# Altium PCB PCB_assembly_drawing_try2.PcbDoc (part 2 of 5)
Units mm, origin at the board's own origin, x right, y up, seen from the top; angles counter-clockwise.
Board outline 187.5 x 240 mm, 2 copper layers (Top Layer, Bottom Layer), stack 2.8 mm thick; 485 components, 419 nets, 1569 pads, 683 vias.
Unrouted connection lines stored in the file: 11.
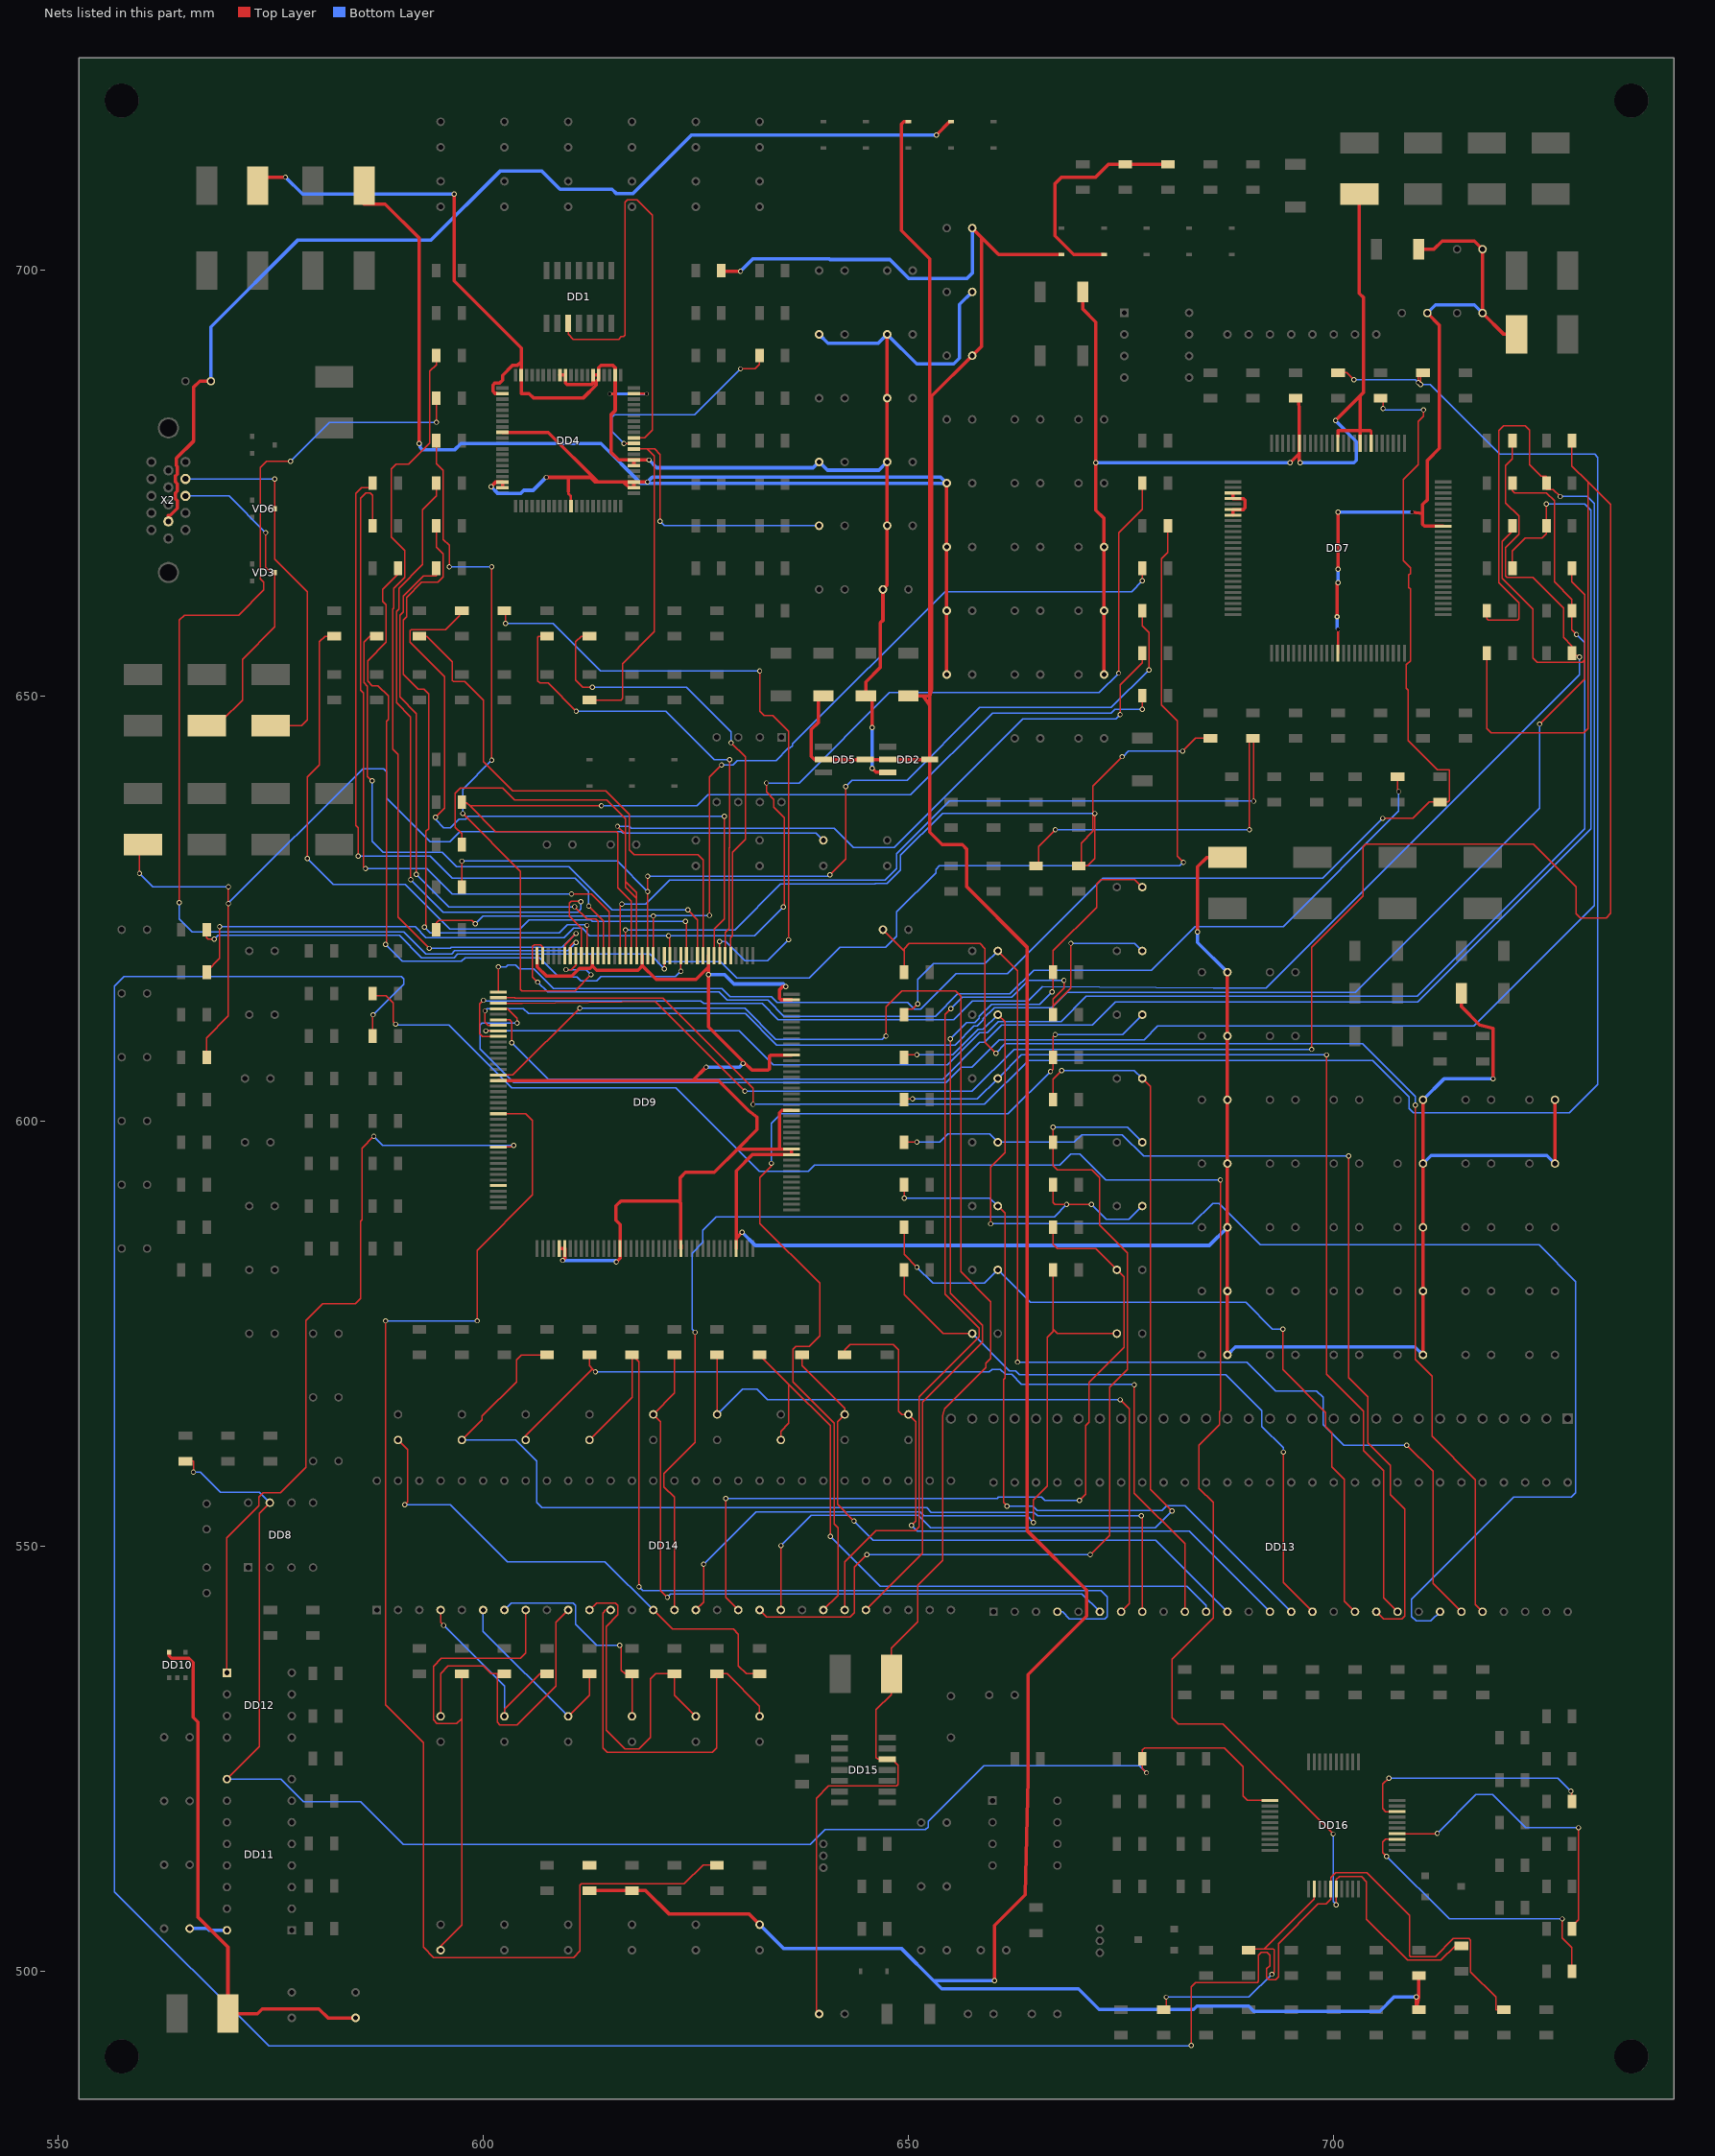
[diagram p2: the nets of this part, all layers, seen from the top]

## Via types
v1: diameter 0.6, hole 0.4, Top Layer to Bottom Layer, 677 vias
v2: diameter 0.5, hole 0.4, Top Layer to Bottom Layer, 3 vias
v3: diameter 0.4, hole 0.4, Top Layer to Bottom Layer, 2 vias
v4: diameter 0.6, hole 0.3, Top Layer to Bottom Layer, 1 vias

## Nets (pads, with @x,y where several pads share a name; then routed paths per layer and width w, separated by ;. In a path a pad name is that pad's centre, name@x,y a point inside that pad or via, vN(x,y) a via of type N, cw(c..) or ccw(c..) an arc to the next point about the centre after c; other vN are vias at no path point) (continued)
3V3SD: C64.1 C65.2 C66.2 C67.2 C68.2 C69.2 C71.2 C73.2 C75.2 C77.2 C81.2 C85.2 C89.2 C94.2 C98.2 DD9.17 DD9.36 DD9.45 DD9.46 DD9.56 DD9.67 DD9.77 DD9.91 DD9.92 DD9.99 DD9.109 DD9.119 DD9.129 DD9.141 DD9.150 DD9.160 L19.2 | length 396.9
  Top Layer w0.4: DD9.17@601.8,604.75 624.637,604.75 ; DD9.160@606.35,619.45 606.35,618.133 607.449,617.035 610.408,617.035 611.33,617.957 612.571,617.957 612.85,618.236 ; DD9.45@608.95,585 DD9.46@609.6,585 609.6,583.87 v1(609.346,583.616) ; DD9.150@612.85,619.45 612.85,618.236 ; v1(615.645,583.438) 616.1,583.893 DD9.56@616.1,585 616.1,587.835 615.62,588.315 615.62,590.017 616.204,590.601 622.945,590.601 ; DD9.67@623.25,585 623.25,585.411 623.199,585.462 623.199,590.347 622.945,590.601 ; v1(626.236,606.349) 624.637,604.75 ; DD9.129@626.5,619.45 626.5,618.127 ; DD9.77@629.75,585 629.75,586.214 ; v1(630.453,586.918) 629.75,586.214 ; v1(630.555,606.755) v1@630.688,606.888 ; v1(635.584,615.798) 635.203,615.798 634.848,615.442 634.848,614.402 635,614.25 DD9.119@636.25,614.25 ; DD9.99@636.25,601.25 635.134,601.25 634.848,600.964 634.848,596.852 635,596.7 ; DD9.109@636.25,607.75 633.76,607.75 633.654,607.644 633.654,606.12 633.501,605.968 631.608,605.968 v1@630.688,606.888 ; v1(683.997,622.224) 683.997,629.895 685.102,631 L19.2@687.5,631 ; C73.2@687.5,572.5 C71.2@687.5,580 C68.2@687.5,587.5 C69.2@687.5,595 C65.2@687.5,602.5 C67.2@687.5,610 C66.2@687.5,617.5 ; C81.2@710.5,572.5 C77.2@710.5,580 C75.2@710.5,587.5 C89.2@710.5,595 C85.2@710.5,602.5 ; C64.1@715,615 715,613.461 717.159,611.302 718.718,610.895 v1(718.718,604.952) ; C98.2@726,595 C94.2@726,602.5 ; 612.85,618.236 613.358,617.728 618.192,617.728 618.726,618.262 ; 618.726,618.262 DD9.141@618.7,619.45 618.7,618.289 618.726,618.262 ; 618.726,618.262 620.331,616.658 625.031,616.658 626.5,618.127 ; 622.945,590.601 623.189,590.601 623.189,593.344 623.799,593.954 627.177,593.954 629.923,596.7 ; 624.637,604.75 627.683,604.75 631.241,601.193 632.206,600.456 632.206,598.983 629.923,596.7 ; 626.5,618.127 v1(626.5,617.211) 626.5,611.076 v1@630.688,606.888 ; 629.75,586.214 629.75,594.143 631.658,596.05 DD9.91@636.25,596.05 DD9.92@636.25,596.7 635,596.7 ; 629.923,596.7 635,596.7
  Bottom Layer w0.4: v1(609.346,583.616) 615.467,583.616 v1(615.645,583.438) ; v1(626.236,606.349) 630.149,606.349 v1(630.555,606.755) ; v1(626.5,617.211) 628.383,617.211 629.479,616.115 635.267,616.115 v1(635.584,615.798) ; v1(630.453,586.918) 632.003,585.368 685.368,585.368 C68.2@687.5,587.5 ; v1(683.997,622.224) 683.997,621.003 C66.2@687.5,617.5 ; C73.2@687.5,572.5 688.456,573.456 709.544,573.456 C81.2@710.5,572.5 ; C89.2@710.5,595 711.46,595.96 725.04,595.96 C98.2@726,595 ; C85.2@710.5,602.5 712.952,604.952 v1(718.718,604.952)
5V_DDC: R50.2 R51.2 VD15.1 | length 27
  Top Layer w0.4: VD15.1@673,701.9 669.421,701.9 667.233,704.088 667.233,710.209 668.02,710.997 672.008,710.997 673.511,712.5 R50.2@675.5,712.5 R51.2@680.5,712.5
5V_STBY: C6.1 C9.1 C35.1 C36.1 C169.1 DD2.2 DD2.4 DD5.2 DD5.4 R1.2 R206.1 R207.1 R209.1 R236.2 VD9.1 VD16.1 | length 482
  Top Layer w0.4: R206.1@612.5,509.5 R207.1@617.5,509.5 619.124,509.5 621.843,506.781 631.219,506.781 C169.1@632.5,505.5 ; R1.2@628,700 628,699.922 v1(630.25,699.922) ; C35.1@640,650 639.394,650 639.394,646.836 638.581,646.024 638.581,642.874 638.955,642.5 DD5.2@640,642.5 DD5.4@644.925,642.5 DD2.2@647.575,642.5 DD2.4@652.5,642.5 ; C6.1@650,650 651.764,650 ; VD9.1@650,717.5 649.453,717.5 649.158,717.205 649.158,704.713 652.501,701.37 652.501,650 ; C36.1@657.5,705 658.571,703.929 ; v1(660.121,498.907) 660.121,505.384 663.735,508.999 664.083,522.648 664.083,534.924 670.966,541.807 670.966,544.83 663.931,551.866 663.931,620.46 656.869,627.521 656.869,631.952 656.336,632.485 653.974,632.485 652.501,633.959 DD2.4@652.5,642.5 ; VD16.1@668,701.9 660.6,701.9 658.571,703.929 ; v1(709.701,496.997) R236.2@709.701,495.5 ; R236.2@710,495.5 R236.2@709.701,495.5 ; R209.1@710,499.5 709.981,499.5 709.981,496.997 709.971,496.947 709.711,495.554 R236.2@709.701,495.5 ; 651.764,650 652.501,648.92 ; 651.764,650 652.501,650 ; DD2.4@652.5,642.5 652.501,648.92 ; 652.501,648.92 652.501,650 ; 652.501,650 652.729,650.748 652.729,685.229 C9.1@657.5,690 658.571,691.071 658.571,703.929
  Bottom Layer w0.4: v1(630.25,699.922) 631.686,701.358 640.728,701.358 640.793,701.294 647.827,701.294 650.075,699.046 656.844,699.046 657.5,699.702 C36.1@657.5,705 ; C169.1@632.5,505.5 635.283,502.717 649.148,502.717 652.958,498.907 ; v1(660.121,498.907) 652.958,498.907 ; v1(709.701,496.997) 707.081,496.997 705.398,495.315 690.602,495.315 690,495.917 683.92,495.917 683.523,495.52 672.397,495.52 669.976,497.942 653.923,497.942 652.958,498.907
5V_VGA: C172.2 VD10.1 X2.9 | length 125.5
  Top Layer w0.4: X2.9@563,670.5 563,671.201 563.192,671.201 564.054,672.063 564.054,672.937 563.8,673.191 563.8,673.809 564.054,674.063 564.054,674.937 563.8,675.191 563.8,675.809 564.054,676.063 564.054,676.955 563.946,677.063 563.946,677.937 565.988,679.979 565.988,686.308 566.68,687 C172.2@568,687 ; v1(653.287,715.95) 654.837,717.5 VD10.1@655,717.5
  Bottom Layer w0.4: C172.2@568,687 568,693.374 578.231,703.605 593.903,703.605 601.98,711.683 606.905,711.683 609.041,709.546 615.174,709.546 615.692,709.028 617.563,709.028 624.484,715.95 v1(653.287,715.95)
5Va: C130.2 DD11.16 | length 4.5
  Bottom Layer w0.4: C130.2@565.5,505.04 567.588,505.04 567.788,504.84 DD11.16@569.88,504.84
5Vb: C128.1 DD10.5 L20.2 | length 62.2
  Top Layer w0.4: DD10.5@563.1,537.54 563.1,537.101 563.372,536.829 565.404,536.829 565.912,536.321 565.912,529.869 566.454,529.327 566.454,506.391 570,502.845 L20.2@570,495.04 573.456,495.04 574.021,495.605 580.695,495.605 581.76,494.54 C128.1@585,494.54
12MHZ: C158.1 DD9.16 DD15.12 L24.1 | length 201.5
  Top Layer w0.15: DD9.16@601.8,605.4 603.495,605.4 v1(611.353,613.258) ; C158.1@639.5,495 639.166,495 639.166,520.333 640.625,521.792 648.614,521.792 648.792,521.97 648.792,524.256 648.088,524.96 DD15.12@647.5,524.96 646.386,524.96 646.201,525.145 646.201,530.763 648,532.562 L24.1@648,535 648,538.023 651.078,541.101 651.078,545.389 654.05,548.361 654.05,565.361 654.251,566.138 659.111,570.998 659.111,571.519 659.663,572.072 659.663,578.764 656.158,582.27 656.158,614.68 655.529,615.309 649.224,615.309 647.344,613.429 v1(647.344,610.006)
  Bottom Layer w0.15: v1(611.353,613.258) 630.756,613.258 634.414,609.6 646.938,609.6 v1(647.344,610.006)
9883_HS: DD4.30 R14.2 | length 25.8
  Top Layer w0.15: v1(616.544,679.675) DD4.30@617.722,679.675 ; v1(630.25,688.442) 631.952,688.442 632.5,688.99 R14.2@632.5,690
  Bottom Layer w0.15: v1(616.544,679.675) 615.143,681.076 615.143,682.752 615.419,683.028 624.836,683.028 v1(630.25,688.442)
9883_VS: DD1.10 DD4.31 | length 56
  Top Layer w0.15: DD1.10@610,693.8 610,692.506 610.584,691.921 615.928,691.921 616.222,692.215 616.498,692.215 616.671,692.388 616.671,708.035 616.966,708.33 618.097,708.33 619.9,706.527 619.9,681.216 619.009,680.325 DD4.31@617.722,680.325
+3V3: C1.1 C2.1 C3.1 C4.1 DD4.11 DD4.22 DD4.23 DD4.69 DD4.78 DD4.79 L1.1 | length 201.4
  Top Layer w0.3: 610.026,674.01 610.026,673.774 610.3,673.5 610.3,672.8 DD4.11@610.4,672.7
  Top Layer w0.4: L1.1@586,710 586,707.822 588.493,707.822 592.48,703.834 v1(592.48,679.653) ; v1(600.939,674.592) 601.472,675.125 DD4.78@602.278,675.125 DD4.79@602.278,674.475 ; DD4.69@602.278,680.975 607.643,680.975 613.486,675.132 616.538,675.132 616.545,675.125 ; v1(607.403,675.687) 610.026,675.687 ; 610.026,674.01 610.026,675.687 ; v1(619.306,675.125) DD4.23@617.722,675.125 ; C1.1@654.5,652.5 C2.1@654.5,660 C3.1@654.5,667.5 C4.1@654.5,675 ; 610.026,675.687 612.649,675.687 613.211,675.125 616.545,675.125 ; 616.545,675.125 DD4.23@617.722,675.125 ; 616.545,675.125 617.195,674.475 DD4.22@617.722,674.475 DD4.23@617.722,675.125
  Bottom Layer w0.4: v1(592.48,679.653) 592.58,679.653 592.58,679.206 592.836,678.95 596.689,678.95 597.392,679.653 613.867,679.653 618.52,675 C4.1@654.5,675 653.809,675.691 619.872,675.691 v1(619.306,675.125) ; v1(600.939,674.592) 601.758,673.773 604.377,673.773 604.765,674.161 605.877,674.161 v1(607.403,675.687)
A3_3V: C57.1 C58.2 C59.2 C60.2 DD7.82 DD7.84 DD7.88 DD7.95 L18.2 R59.1 | length 130.7
  Top Layer w0.3: 704.3,681.2 704.4,681.1 DD7.82@704.4,679.7
  Top Layer w0.4: C57.1@670.5,697.5 670.5,695.477 672.033,693.944 v1(672.033,677.393) 672.033,671.814 673,670.847 C58.2@673,667.5 C59.2@673,660 C60.2@673,652.5 ; v1(694.868,677.393) 695.95,678.475 ; R59.1@695.5,685 695.886,685 695.95,683.201 DD7.95@695.95,679.7 695.95,678.475 ; v1(696.036,677.393) 695.95,677.479 695.95,678.475 ; v1(700.202,682.371) 703.1,685.269 ; DD7.88@700.5,680.5 700.5,681.2 703.1,681.2 ; L18.2@703,709 703,697.327 703.478,696.849 703.478,685.648 703.1,685.269 ; DD7.84@703.1,679.7 703.1,681.2 ; 704.3,681.2 703.1,681.2 ; 703.1,681.2 703.1,685.269
  Bottom Layer w0.4: v1(672.033,677.393) v1(694.868,677.393) ; v1(696.036,677.393) 702.386,677.393 702.666,677.672 702.666,679.907 v1(700.202,682.371)
A3V3: C12.1 C14.1 C26.1 C28.1 C30.1 C31.1 C32.1 C33.1 C34.1 DD2.3 DD4.26 DD4.27 DD4.39 DD4.42 DD4.45 DD4.46 DD4.51 DD4.52 DD4.59 DD4.62 L7.1 | length 212.3
  Top Layer w0.3: v2(614.9,685.5) 615.525,685.5 615.583,685.5 ; DD4.39@617.722,685.525 v2@619.175,685.525
  Top Layer w0.4: L7.1@573.5,710 573.5,710.997 v1(576.758,710.997) ; v1(596.595,708.99) 596.595,698.779 604.475,690.9 604.475,689.311 ; 601.538,685.559 601.382,685.559 601.147,685.794 601.147,686.556 601.382,686.79 601.969,686.79 602.278,687.1 602.278,687.687 603.444,688.853 604.017,688.853 604.475,689.311 ; DD4.52@609.025,687.722 DD4.51@609.675,687.722 609.679,687.718 609.679,686.762 609.854,686.587 612.775,686.587 612.925,686.737 DD4.46@612.925,687.722 DD4.45@613.575,687.722 ; DD4.26@617.722,677.075 DD4.27@617.722,677.725 ; v1(619.506,677.725) DD4.27@617.722,677.725 ; v1(645.744,641.453) 646.197,641 DD2.3@647.575,641 ; v1(645.744,646.252) 645.744,650 C14.1@645,650 645,651.629 646.709,653.339 646.709,658.585 647,658.876 C34.1@647,662.5 647.5,663 C33.1@647.5,670 647.5,673.735 C32.1@647.5,677.5 647.5,681.228 C31.1@647.5,685 C30.1@647.5,692.5 ; 604.475,689.311 DD4.59@604.475,687.722 604.475,685.525 605.409,685.525 605.888,685.046 611.805,685.046 613.294,686.535 613.294,686.984 613.575,687.265 DD4.45@613.575,687.722 ; DD4.45@613.575,687.722 613.575,688.594 613.854,688.873 615.246,688.873 615.525,688.594 DD4.42@615.525,687.722 615.525,685.5 615.525,683.53 615.018,683.023 615.018,678.657 615.95,677.725 DD4.27@617.722,677.725
  Bottom Layer w0.3: v2(614.9,685.5) v2(619.2,685.5)
  Bottom Layer w0.4: v1(576.758,710.997) 578.764,708.99 v1(596.595,708.99) ; v1(619.506,677.725) 620.418,676.813 638.813,676.813 C26.1@639.5,677.5 640.471,676.529 646.529,676.529 C32.1@647.5,677.5 ; C28.1@639.5,692.5 640.561,691.439 646.439,691.439 C30.1@647.5,692.5 650.974,689.026 655.32,689.026 656.006,689.712 656.006,696.006 C12.1@657.5,697.5 ; v1(645.744,641.453) v1(645.744,646.252)
ADC1: DD16.34 R222.2 | length 37.1
  Top Layer w0.15: DD16.34@707.45,516.2 712.136,516.2 v1(712.165,516.23) ; R222.2@728,505 728,505.308 728.777,506.084 v1(728.777,516.89)
  Bottom Layer w0.15: v1(712.165,516.23) 716.724,520.788 718.675,520.788 722.573,516.89 v1(728.777,516.89)
ADC2: DD16.33 R224.2 | length 34
  Top Layer w0.15: v1(706.222,513.537) 705.764,513.994 705.764,515.194 706.12,515.55 DD16.33@707.45,515.55 ; v1(726.872,506.171) 726.872,503.911 728,502.782 R224.2@728,500
  Bottom Layer w0.15: v1(706.222,513.537) 713.588,506.171 v1(726.872,506.171)
ASIC_H: C39.1 L9.2 R108.2 | length 118.9
  Top Layer w0.15: v1(559.613,629.107) 559.613,632.5 L9.2@560,632.5 ; R108.2@567.5,607.5 567.5,609.791 570.052,612.343 v1(570.052,625.551) v1(570.052,627.532)
  Bottom Layer w0.15: v1(559.613,629.107) 561.188,627.532 v1(570.052,627.532) ; v1(570.052,625.551) 570.052,625.642 585.851,641.441 588.289,641.441 588.634,641.096 588.634,637.969 593.779,632.824 596.062,632.824 597.279,634.041 616.243,634.041 616.427,633.857 639.143,633.857 C39.1@640,633
ASIC_RESET: DD8.7 DD11.9 DD16.11 R118.2 R182.1 | length 185.7
  Top Layer w0.15: R118.2@565,560 565.937,560 v1(565.937,558.724) ; DD11.9@569.88,522.62 573.684,526.424 573.684,553.884 DD8.7@574.92,555.12 ; v1(677.977,523.367) 677.5,523.844 R182.1@677.5,525 677.5,526.034 677.754,526.288 687.146,526.288 689.356,524.078 689.356,520.608 689.864,520.1 DD16.11@692.5,520.1
  Bottom Layer w0.15: v1(565.937,558.724) 566.751,558.724 569.121,556.353 573.282,556.353 573.31,556.325 573.715,556.325 DD8.7@574.92,555.12 ; DD11.9@569.88,522.62 576.235,522.62 578.891,519.963 585.572,519.963 590.601,514.934 638.48,514.934 640.217,516.671 652.018,516.671 652.329,516.982 652.329,517.62 658.889,524.18 677.164,524.18 v1(677.977,523.367)
ASIC_SCL: DD16.26 R114.2 R221.2 | length 237.1
  Top Layer w0.15: R114.2@587,615 587,614.731 588.569,614.731 589.432,613.867 589.432,611.657 v1(589.712,611.378) ; v1(686.664,593.065) 686.664,565.912 686.562,565.81 686.562,564.29 684.171,561.899 684.171,556.822 685.851,555.142 685.851,541.553 680.999,536.702 680.999,529.819 681.736,529.082 686.994,529.082 v1(699.922,516.153) ; v1(700.3,507.822) DD16.26@700.3,509.7 700.3,510.794 700.656,511.15 703.25,511.15 703.859,510.54 703.859,506.146 708.684,501.321 712.593,501.321 714.272,503 R221.2@715,503
  Bottom Layer w0.15: v1(589.712,611.378) 589.788,611.302 595.963,611.302 603.377,603.887 622.653,603.887 632.46,594.081 638.226,594.081 638.962,594.817 667.766,594.817 669.061,596.113 670.154,596.113 673.202,593.065 v1(686.664,593.065) ; v1(699.922,516.153) 699.922,508.2 v1(700.3,507.822)
ASIC_SDA: DD16.25 R115.2 R219.2 | length 357.1
  Top Layer w0.15: R115.2@587,610 587,612.425 v1(587.07,612.496) ; v1(683.235,491.312) 683.235,498.17 683.768,498.704 691.007,498.704 691.159,498.856 691.159,501.904 691.499,502.243 692.15,502.243 692.48,501.913 692.48,500.679 692.105,500.304 692.105,499.333 692.404,499.034 693.166,499.034 693.496,499.364 693.496,503.263 698.164,507.931 699.073,507.931 699.65,508.508 DD16.25@699.65,509.7 699.65,511.048 700.209,511.607 703.885,511.607 708.914,506.578 708.914,501.852 709.041,501.725 711.935,501.725 714.07,503.86 715.924,503.86 716.102,503.682 716.102,499.948 719.074,496.976 719.074,495.5 R219.2@720,495.5
  Bottom Layer w0.15: v1(587.07,612.496) 590.652,616.077 590.652,616.712 590.372,616.991 582.675,616.991 582.656,616.972 557.79,616.972 556.666,615.848 556.666,509.372 574.802,491.236 630.775,491.236 630.792,491.219 683.141,491.219 v1(683.235,491.312)
AUDIO_EN: DD16.38 R215.2 | length 29
  Top Layer w0.15: v1(706.476,522.732) 705.764,522.021 705.764,519.156 706.12,518.8 DD16.38@707.45,518.8 ; v1(727.888,521.183) 728,521.07 R215.2@728,520
  Bottom Layer w0.15: v1(706.476,522.732) 726.338,522.732 v1(727.888,521.183)
AUDIO_MUTE: DD16.22 R212.2 R233.1 | length 31.2
  Top Layer w0.15: R212.2@680,495.5 680.288,495.5 v1(680.288,496.976) ; R233.1@690,502.5 R233.1@690.105,502.5 ; v1(692.734,499.669) 692.988,499.923 692.988,502.567 692.907,502.648 691.816,502.648 ; DD16.22@697.7,509.7 697.7,508.531 691.816,502.648 ; R233.1@690.105,502.5 R233.1@690.253,502.648 ; R233.1@690.105,502.5 690.105,502.648 R233.1@690.253,502.648 ; R233.1@690.253,502.648 691.816,502.648
  Bottom Layer w0.15: v1(680.288,496.976) 690.042,496.976 v1(692.734,499.669)
B_IN: L4.1 VD3.3 X2.3 | length 39
  Top Layer w0.15: L4.1@567.5,646.5 567.5,647.09 569.29,647.09 571.703,649.503 571.703,654.304 575.5,658.101 VD3.3@575.5,664.5 575.056,664.5 574.446,665.11 v1(574.446,669.188)
  Bottom Layer w0.15: X2.3@565,673.5 570.135,673.5 v1(574.446,669.188)
B_INA0: DD9.147 R32.2 | length 85
  Top Layer w0.15: v1(586.181,629.666) 585.947,629.901 585.947,650.322 585.597,650.672 585.597,673.227 586.232,673.862 586.721,673.862 587,673.583 R32.2@587,670 ; v1(610.387,626.694) 612.722,626.694 614.8,624.616 DD9.147@614.8,619.45
  Bottom Layer w0.15: v1(586.181,629.666) 593.397,629.666 596.369,626.694 v1(610.387,626.694)
B_INA1: DD9.148 R31.2 | length 82.6
  Top Layer w0.15: v1(585.318,631.165) 585.318,634.492 585.038,634.771 585.038,673.811 585.724,674.497 587,674.497 R31.2@587,675 ; v1(612.419,625.272) 614.15,623.541 DD9.148@614.15,619.45
  Bottom Layer w0.15: v1(585.318,631.165) 593.801,631.165 596.392,628.574 610.832,628.574 612.419,626.986 v1(612.419,625.272)
B_INA2: DD9.149 R30.2 | length 67.2
  Top Layer w0.15: v1(592.15,629.006) 592.15,647.903 590.203,649.85 590.203,659.49 590.592,659.88 590.592,661.738 592.968,664.113 594.5,664.113 R30.2@594.5,665 ; v1(610.743,625.196) 612.2,623.738 613.259,623.738 613.5,623.498 DD9.149@613.5,619.45
  Bottom Layer w0.15: v1(592.15,629.006) 595.96,625.196 v1(610.743,625.196)
B_INA3: DD9.151 R29.2 | length 75.8
  Top Layer w0.15: v1(593.09,622.783) 593.268,622.96 593.268,634.06 593.598,634.39 593.598,650.24 593.065,650.773 592.365,650.773 590.607,652.531 590.607,658.893 590.996,659.282 590.996,661.558 592.785,663.346 594.69,663.346 595.3,663.956 595.3,666.674 594.5,667.474 R29.2@594.5,670 ; DD9.151@612.2,619.45 v1(612.2,623.002)
  Bottom Layer w0.15: v1(593.09,622.783) 593.75,622.122 608.962,622.122 609.919,623.079 612.123,623.079 v1(612.2,623.002)
B_INA4: DD9.152 R28.2 | length 80.1
  Top Layer w0.15: v1(591.49,628.396) 591.49,647.488 589.799,649.178 589.799,659.894 590.099,660.195 590.099,662.644 592.887,665.431 592.887,671.893 594.5,673.506 R28.2@594.5,675 ; v1(611.505,625.805) 611.486,625.825 610.337,625.825 610.114,625.602 610.114,624.111 611.55,622.675 DD9.152@611.55,619.45
  Bottom Layer w0.15: v1(591.49,628.396) 595.325,624.561 611.124,624.561 611.505,624.942 v1(611.505,625.805)
B_INA5: DD9.153 R27.2 | length 89.2
  Top Layer w0.15: R27.2@594.5,680 594.5,677.303 595.3,676.504 595.3,668.401 596.011,667.69 v1(596.011,665.15) ; v1(597.611,636.143) 604.393,629.361 604.393,615.442 604.551,615.284 610.788,615.284 v1(612.699,617.195) ; v1(601.015,642.417) v1(601.015,665.15) ; v1(609.752,617.804) 610.341,617.804 610.9,618.363 DD9.153@610.9,619.45
  Bottom Layer w0.15: v1(596.011,665.15) v1(601.015,665.15) ; v1(597.611,636.143) 597.611,639.013 v1(601.015,642.417) ; v1(609.752,617.804) 612.089,617.804 v1(612.699,617.195)
B_INA6: DD9.154 R26.2 | length 137.7
  Top Layer w0.15: v1(564.269,625.687) 564.28,625.698 564.28,658.877 564.896,659.493 571.274,659.493 574.213,662.432 574.213,663.374 573.811,663.776 573.811,676.834 574.548,677.57 v1(577.342,677.57) ; v1(594.5,682.168) R26.2@594.5,685 ; DD9.154@610.25,619.45 610.25,620.588 610.667,621.005 v1(610.921,621.005)
  Bottom Layer w0.15: v1(564.269,625.687) 564.269,623.754 565.794,622.23 590.671,622.23 593.242,619.658 596.296,619.658 596.662,620.024 609.94,620.024 v1(610.921,621.005) ; v1(577.342,677.57) 581.939,682.168 v1(594.5,682.168)
B_INA7: DD9.155 R25.2 | length 96.9
  Top Layer w0.15: v1(593.649,620.293) 589.985,623.957 589.985,643.122 589.395,643.712 589.395,660.197 589.509,660.31 589.509,662.635 590.779,663.905 590.779,667.08 589.204,668.655 589.204,676.656 589.788,677.24 591.261,677.24 593.725,679.704 593.725,688.162 594.5,688.937 R25.2@594.5,690 ; DD9.155@609.6,619.45 609.6,620.725 v1(610.921,622.046)
  Bottom Layer w0.15: v1(593.649,620.293) 596.123,620.293 596.258,620.428 609.303,620.428 v1(610.921,622.046)
B_INB0: DD9.1 R73.2 R97.2 | length 184.1
  Top Layer w0.15: v1(601.777,618.134) 601.777,615.15 DD9.1@601.8,615.15 ; R73.2@705.5,685 705.79,685 v1(705.79,683.768) ; v1(705.764,635.584) 709.335,635.584 711.251,637.5 R97.2@712.5,637.5 713.421,637.5 713.588,637.667 713.588,641.325 712.182,641.325 708.762,644.745 708.762,650.652 708.539,650.875 708.539,653.65 709.003,654.114 709.003,662.573 708.828,662.749 708.828,664.191 709.003,664.367 709.003,665.076 708.186,665.894 708.186,667.656 708.186,675.458 709.902,677.174 709.902,682.242 710.565,682.904 v1(710.565,683.633)
  Bottom Layer w0.15: v1(601.777,618.134) 602.713,618.134 602.894,618.316 603.831,618.316 604.241,617.906 605.982,617.906 608.293,615.594 628.066,615.594 629.036,614.624 633.869,614.624 634.55,613.943 649.89,613.943 650.697,613.137 651.434,613.137 655.606,617.309 661.623,617.309 672.863,628.548 698.729,628.548 v1(705.764,635.584) ; v1(705.79,683.768) 705.925,683.633 v1(710.565,683.633)
B_INB1: DD9.2 R72.2 R96.2 | length 253.6
  Top Layer w0.15: DD9.2@601.8,614.5 603.719,614.5 603.743,614.476 621.111,614.476 631.723,603.863 v1(631.723,601.955) ; R72.2@700.5,688 701.548,688 v1(702.376,687.172) ; v1(709.955,686.816) 709.955,688 R96.2@710.209,688 ; v1(710.209,686.587) R96.2@710.209,688 ; R96.2@710.5,688 R96.2@710.209,688
  Bottom Layer w0.15: v1(631.723,601.955) 658.927,601.955 664.108,607.136 704.544,607.136 708.837,602.844 708.837,601.472 709.345,600.964 727.71,600.964 731.037,604.291 731.037,678.05 730.679,678.409 719.506,678.409 711.327,686.587 v1(710.209,686.587) ; v1(702.376,687.172) 709.6,687.172 v1(709.955,686.816)
B_INB2: DD9.3 R71.2 R95.2 | length 270.8
  Top Layer w0.15: DD9.3@601.8,613.85 604.63,613.85 620.233,614.029 v1(630.758,603.504) ; v1(697.408,608.432) 697.408,620.42 703.453,626.466 703.453,632.206 703.783,632.536 723.494,632.536 728.472,627.558 728.472,624.389 728.98,623.881 732.028,623.881 732.561,624.414 732.561,672.476 729.911,675.126 ; R95.2@718,655 718,646.176 718.508,645.668 729.403,645.668 729.911,646.176 729.911,675.126 ; R71.2@728,680 728,677.037 729.911,675.126
  Bottom Layer w0.15: v1(630.758,603.504) 657.479,603.504 662.407,608.432 v1(697.408,608.432)
B_INB3: DD9.4 R70.2 R94.2 | length 245.4
  Top Layer w0.15: DD9.4@601.8,613.2 602.876,613.2 604.012,612.064 v1(604.012,611.516) ; R94.2@718,660 718,659.086 718.185,658.901 721.614,658.901 721.792,659.079 721.792,660.908 719.404,663.296 719.404,681.189 719.952,681.736 722.503,681.736 723.011,681.228 723.011,677.196 724.391,675.816 725,675.816 R70.2@725,675 725,674.268 725.78,674.268 v1(726.618,673.43)
  Bottom Layer w0.15: v1(604.012,611.516) 599.883,611.516 599.669,611.302 599.669,608.482 603.614,604.537 654.404,604.537 656.2,606.334 657.479,606.334 660.671,609.526 677.699,609.526 679.323,611.149 716.458,611.149 730.631,625.323 730.631,672.592 729.793,673.43 v1(726.618,673.43)
B_INB4: DD9.6 R69.2 R93.2 | length 198.3
  Top Layer w0.15: DD9.6@601.8,611.9 603.122,611.9 603.377,611.645 v1(603.377,609.219) ; R93.2@721,665 721,667.004 722.524,668.528 724.492,668.528 725,669.036 R69.2@725,670 v1(725,672.567)
  Bottom Layer w0.15: v1(603.377,609.219) 607.655,604.941 654.059,604.941 658.368,609.25 658.953,609.25 660.97,611.267 671.617,611.267 674.345,613.994 709.867,613.994 730.225,634.352 730.225,671.83 729.488,672.567 v1(725,672.567)
B_INB5: DD9.7 R68.2 R92.2 | length 195.5
  Top Layer w0.15: v1(600.227,612.953) 600.227,611.632 600.609,611.25 DD9.7@601.8,611.25 ; R92.2@721,670 721,669.326 719.821,668.147 719.821,663.79 723.392,660.219 723.392,654.431 723.9,653.923 729.228,653.923 729.507,654.202 ; v1(724.205,646.684) 729.507,651.987 729.507,654.202 ; R68.2@728,665 728,663.412 729.507,661.905 729.507,654.202
  Bottom Layer w0.15: v1(600.227,612.953) 600.481,613.207 604.735,613.207 605.314,612.629 630.814,612.629 634.52,608.922 655.465,608.922 657.702,611.159 658.065,611.159 658.765,611.859 658.765,612.004 660.09,613.329 666.826,613.329 668.634,615.137 702.526,615.137 724.205,636.816 v1(724.205,646.684)
B_INB6: DD9.8 R67.2 R91.2 | length 190.2
  Top Layer w0.15: v1(600.304,610.591) 600.313,610.6 DD9.8@601.8,610.6 ; R91.2@721,675 721,674.116 721.254,673.862 725.018,673.862 725.932,672.948 725.932,663.408 728,661.34 R67.2@728,660 728,657.748 v1(728.523,657.225)
  Bottom Layer w0.15: v1(600.304,610.591) 630.117,610.591 634.105,606.603 654.603,606.603 658.365,610.365 659.251,610.365 660.558,611.671 667.932,611.671 670.916,614.655 709.828,614.655 729.513,634.34 729.513,656.234 v1(728.523,657.225)
B_INB7: DD9.9 R66.2 R90.2 | length 188
  Top Layer w0.15: v1(600.023,614.196) 599.598,613.772 599.598,610.3 599.948,609.95 DD9.9@601.8,609.95 ; R90.2@721,680 721,677.85 720.217,677.067 720.217,672.694 721.792,671.119 721.792,669.011 720.225,667.444 720.225,664.083 720.383,663.925 723.392,663.925 726.999,660.318 726.999,656.844 728,655.843 R66.2@728,655 728,654.71 728.726,654.71 v1(728.878,654.558)
  Bottom Layer w0.15: v1(600.023,614.196) 600.098,614.121 625.602,614.121 625.907,613.816 632.79,613.816 634.695,611.911 655.32,611.911 657.546,614.137 664.083,614.137 665.769,615.823 685.823,615.613 692.033,615.613 728.878,652.458 v1(728.878,654.558)
BA0: C117.2 DD14.16 R136.1 | length 86
  Top Layer w0.15: DD14.16@625,542.5 625.907,543.407 v1(625.907,547.878) ; v1(664.693,552.806) 664.693,555.447 666.333,557.088 666.333,574.588 667,575.255 667,575.512 ; R136.1@667,582.5 667,575.512 ; C117.2@674.5,575 667.512,575 667,575.512
  Bottom Layer w0.15: v1(625.907,547.878) 632.053,554.024 651.393,554.024 651.85,553.568 663.931,553.568 v1(664.693,552.806)
BA1: C114.2 DD14.18 R135.1 | length 95.9
  Top Layer w0.15: v1(628.523,555.625) 628.523,543.977 DD14.18@630,542.5 ; R135.1@667,587.5 667,585.499 667.512,584.987 672.013,584.987 C114.2@674.5,582.5 675.335,581.665 675.335,573.38 671.246,569.29 671.246,564.591 670.839,564.185 670.839,556.108 v1(670.103,555.371)
  Bottom Layer w0.15: v1(628.523,555.625) 660.432,555.625 660.561,555.754 665.662,555.754 666.045,555.371 v1(670.103,555.371)
BA2: C111.2 DD14.15 R134.1 | length 105.5
  Top Layer w0.15: DD14.15@622.5,542.5 622.5,555.759 621.267,556.992 621.267,558.537 624.916,562.186 v1(624.916,575.158) ; R134.1@667,592.5 667,590.398 667.203,590.194 v1(668.604,590.194) v1(671.5,590.194)
  Bottom Layer w0.15: v1(624.916,575.158) 624.561,575.513 624.561,584.433 625.841,585.714 625.841,587.172 627.416,588.747 667.156,588.747 v1(668.604,590.194) ; v1(671.5,590.194) 673.278,588.416 675.916,588.416 C111.2@677.5,590
BA3: C108.2 DD14.19 R133.1 | length 114.7
  Top Layer w0.15: DD14.19@632.5,542.5 633.345,541.655 643.128,541.655 643.636,542.163 643.636,547.522 v1(645.109,548.996) ; v1(667,599.262) R133.1@667,597.5 667,594.77 667.512,594.258 671.576,594.258 672.49,593.344 672.49,587.756 675.742,584.505 675.742,570.763 673.667,568.689 673.667,551.29 v1(671.373,548.996)
  Bottom Layer w0.15: v1(645.109,548.996) v1(671.373,548.996) ; v1(667,599.262) 675.738,599.262 C108.2@677.5,597.5
BA4: C105.2 DD14.20 R132.1 | length 122.5
  Top Layer w0.15: DD14.20@635,542.5 v1(635,550.062) ; R132.1@667,602.5 667,604.922 v1(668.02,605.942) ; C105.2@677.5,605 678.434,604.066 678.434,556.666 v1(680.974,554.126)
  Bottom Layer w0.15: v1(635,550.062) 638.558,553.62 651.146,553.62 652.589,552.177 679.024,552.177 v1(680.974,554.126) ; v1(668.02,605.942) 676.558,605.942 C105.2@677.5,605
BA5: C102.2 DD14.22 R131.1 | length 116.9
  Top Layer w0.15: v1(633.882,595.02) 633.882,594.698 632.536,593.352 632.536,587.959 639.572,580.923 639.572,574.751 638.327,573.507 636.778,573.507 636.422,573.151 636.422,569.316 641.248,564.49 641.248,552.636 641.725,552.16 641.725,544.225 DD14.22@640,542.5 ; v1(666.695,605.815) 667,606.12 R131.1@667,607.5 667,609.901 v1(667.254,610.155)
  Bottom Layer w0.15: v1(633.882,595.02) 633.882,599.719 635,600.837 661.717,600.837 v1(666.695,605.815) ; v1(667.254,610.155) 675.155,610.155 C102.2@677.5,612.5
BA6: C99.2 DD14.23 R128.1 | length 118.2
  Top Layer w0.15: DD14.23@642.5,542.5 642.5,548.139 646.182,551.821 650.782,551.821 651.258,552.298 651.258,567.565 658.329,574.636 658.329,575.614 654.285,579.658 654.285,612.515 v1(654.969,613.199) ; R128.1@667,612.5 667,613.537 ; v1(668.278,616.551) 668.278,615.628 667,614.35 667,613.537 ; v1(669.112,620.903) 669.112,615.649 667,613.537
  Bottom Layer w0.15: v1(654.969,613.199) 656.311,614.541 662.141,614.541 664.15,616.551 v1(668.278,616.551) ; v1(669.112,620.903) 676.597,620.903 C99.2@677.5,620
BA7: C95.2 DD14.24 R127.1 | length 109.6
  Top Layer w0.15: DD14.24@645,542.5 651.662,549.162 651.662,566.948 658.733,574.018 658.733,575.961 654.914,579.78 v1(654.914,609.651) ; v1(666.877,615.172) 667,615.295 R127.1@667,617.5 667,620.014 672.109,625.123 672.109,627.888 672.617,628.396 676.604,628.396 C95.2@677.5,627.5
  Bottom Layer w0.15: v1(654.914,609.651) 656.826,611.563 657.796,611.563 658.31,612.077 658.31,612.28 659.763,613.733 665.438,613.733 v1(666.877,615.172)
BB0: C91.2 DD13.16 R126.1 | length 76.7
  Top Layer w0.15: R126.1@649.5,582.5 649.5,579.581 654.081,575 C91.2@657.5,575 ; v1(694.08,561.061) 694.08,545.72 DD13.16@697.5,542.3
  Bottom Layer w0.15: C91.2@657.5,575 661.893,570.607 662.6,570.607 663.028,570.179 687.324,570.179 691.566,565.937 691.566,564.083 694.08,561.569 v1(694.08,561.061)
BB1: C86.2 DD13.18 R125.1 | length 89.4
  Top Layer w0.15: R125.1@649.5,587.5 649.5,584.305 v1(651.002,582.803) ; v1(694.004,575.513) 694.004,570.789 699.059,565.734 699.059,564.083 699.795,563.347 699.795,559.308 701.243,557.86 701.243,543.557 DD13.18@702.5,542.3
  Bottom Layer w0.15: v1(651.002,582.803) 652.882,580.923 658.923,580.923 C86.2@660.5,582.5 664.337,578.663 689.65,578.663 692.8,575.513 v1(694.004,575.513)
BB2: C82.2 DD13.15 R124.1 | length 87.8
  Top Layer w0.15: R124.1@649.5,592.5 649.5,590.934 v1(649.503,590.931) ; C82.2@660.5,590 661.34,589.16 661.34,569.762 661.167,569.589 661.167,555.148 v1(661.594,554.721)
  Bottom Layer w0.15: v1(649.503,590.931) 659.569,590.931 C82.2@660.5,590 ; v1(661.594,554.721) 664.618,554.721 665.126,554.213 679.789,554.213 680.345,554.769 682.531,554.769 DD13.15@695,542.3
BB3: C78.2 DD13.19 R123.1 | length 115.1
  Top Layer w0.15: R123.1@649.5,597.5 649.5,597.51 v1(651.002,597.51) ; v1(701.767,595.884) 701.767,569.824 704.012,567.579 704.012,562.127 706.653,559.486 706.653,556.057 708.33,554.38 708.33,541.782 708,541.452 705.848,541.452 DD13.19@705,542.3
  Bottom Layer w0.15: v1(651.002,597.51) 653.669,597.51 654.634,598.475 659.525,598.475 C78.2@660.5,597.5 668.195,597.5 ; 668.195,597.5 669.484,597.5 670.382,598.399 675.132,598.399 677.647,595.884 v1(701.767,595.884)
BB4: C76.2 DD13.20 R122.1 | length 120.8
  Top Layer w0.15: R122.1@649.5,602.5 649.5,602.59 v1(650.494,602.59) ; v1(699.16,607.771) 699.16,570.23 703.485,565.905 703.485,561.232 705.841,558.876 705.841,543.959 DD13.20@707.5,542.3
  Bottom Layer w0.15: v1(650.494,602.59) 658.09,602.59 C76.2@660.5,605 663.271,607.771 v1(699.16,607.771)
BB5: C74.2 DD13.22 R121.1 | length 167.8
  Top Layer w0.15: R121.1@649.5,607.5 649.5,607.797 v1(651.002,607.797) ; v1(659.663,587.908) 659.663,594.589 661.34,596.265 661.34,611.66 C74.2@660.5,612.5
  Bottom Layer w0.15: v1(651.002,607.797) 655.224,607.797 658.197,610.769 658.769,610.769 C74.2@660.5,612.5 ; v1(659.663,587.908) 683.387,587.908 685.775,590.296 686.537,590.296 691.388,585.445 724.129,585.445 728.447,581.127 728.447,556.26 727.939,555.752 721.182,555.752 709.168,543.738 709.168,541.731 709.676,541.223 711.423,541.223 DD13.22@712.5,542.3
BB6: C72.2 DD13.23 R120.1 | length 139.4
  Top Layer w0.15: R120.1@649.5,612.5 649.5,613.171 650.484,613.171 v1(651.078,613.766) ; C72.2@660.5,620 662.838,617.662 v1(662.838,571.652) ; v1(708.584,561.873) 711.657,558.8 711.657,545.643 DD13.23@715,542.3
  Bottom Layer w0.15: v1(651.078,613.766) 651.078,616.66 652.934,618.515 659.015,618.515 C72.2@660.5,620 ; v1(662.838,571.652) 689.813,571.652 693.191,568.274 697.992,568.274 698.754,567.512 698.754,564.286 701.167,561.873 v1(708.584,561.873)
BB7: C70.2 DD13.24 R119.1 | length 145.3
  Top Layer w0.15: C70.2@647,622.5 649.5,620 ; R119.1@649.5,617.5 649.5,620 ; v1(660.273,607.974) 659.003,609.244 659.003,620.268 658.419,620.852 650.084,620.852 649.5,620.268 649.5,620 ; v1(709.6,601.878) 709.6,571.957 711.556,570.001 711.556,562.94 716.661,557.835 716.661,543.139 DD13.24@717.5,542.3
  Bottom Layer w0.15: v1(660.273,607.974) 661.365,609.067 703.399,609.067 709.6,602.866 v1(709.6,601.878)
BL_ON_OFF: R206.2
COAST: C25.2 DD4.29 R18.2 | length 65.3
  Top Layer w0.15: R18.2@612.5,649.5 616.204,649.5 616.407,649.703 616.407,653.796 620.141,657.53 620.141,678.18 619.296,679.025 ; DD4.29@617.722,679.025 619.296,679.025 ; v1(620.801,670.508) 620.801,678.383 620.16,679.025 619.296,679.025
  Bottom Layer w0.15: v1(620.801,670.508) 621.309,670 C25.2@639.5,670
D3_3V: C42.1 C45.2 C47.2 C50.2 DD7.38 DD7.67 L13.2 | length 83.5
  Top Layer w0.3: DD7.38@700.5,655 v3@700.5,657.7
  Top Layer w0.4: v4(700.399,659.299) 700.399,663.199 v1(700.5,663.3) ; v1(700.499,664.899) v1(700.5,671.6) v1(700.5,671.6) ; v3(709.2,671.6) 710.445,671.4 ; C42.1@710,702.5 711.771,702.5 712.749,703.478 716.522,703.478 C50.2@717.5,702.5 C47.2@717.5,695 720,692.5 L13.2@721.5,692.5 ; C45.2@711,695 712.431,693.569 712.431,679.084 711.025,677.677 711.025,673.067 710.445,672.487 710.445,671.4 ; DD7.67@712.85,669.95 710.657,669.95 710.445,670.162 710.445,671.4
  Bottom Layer w0.4: v4(700.399,659.299) 700.399,657.901 v3(700.5,657.8) ; v1(700.499,664.899) v1(700.5,663.3) v1(700.5,663.3) v1@700.5,663.207 ; v1(700.5,671.6) v3(709.2,671.6) ; C45.2@711,695 711.96,695.96 716.54,695.96 C47.2@717.5,695
D3_V3: DD7.3 DD7.4 DD7.6 DD7.7 | length 5.2
  Top Layer w0.4: DD7.7@688.15,671.25 DD7.6@688.15,671.9 689.375,671.9 689.559,672.084 689.559,672.997 689.356,673.2 DD7.4@688.15,673.2 DD7.3@688.15,673.85
DE_IN: DD9.159 R98.2 | length 123.8
  Top Layer w0.15: v1(606.425,616.331) 605.815,616.941 605.815,620.522 606.019,620.725 606.771,620.725 607,620.497 DD9.159@607,619.45 ; R98.2@707.5,640.5 707.5,638.878 v1(707.644,638.734)
  Bottom Layer w0.15: v1(606.425,616.331) 607.574,615.182 627.71,615.182 628.672,614.22 633.476,614.22 635.368,612.329 653.172,612.329 655.788,614.945 661.935,614.945 664.718,617.728 678.542,617.728 683.672,622.859 694.08,622.859 707.644,636.422 v1(707.644,638.734)
FBLK: DD9.23 R189.2 | length 161
  Top Layer w0.15: v1(588.518,576.504) 588.518,531.368 592.963,526.923 592.963,502.844 594.157,501.65 610.641,501.65 611.403,502.412 611.403,510.159 611.53,510.286 623.642,510.286 625.856,512.5 R189.2@627.5,512.5 ; v1(599.313,576.504) 599.313,584.802 605.815,591.304 605.815,600.063 605.028,600.85 DD9.23@601.8,600.85
  Bottom Layer w0.15: v1(588.518,576.504) v1(599.313,576.504)
FCLK1: DD9.29 DD12.1 | length 92.4
  Top Layer w0.15: DD12.1@569.88,535.12 569.88,551.008 573.634,554.761 573.634,555.752 574.142,556.26 576.174,556.26 579.171,559.257 579.171,576.555 581.152,578.536 584.987,578.536 585.572,579.12 585.572,588.213 585.749,588.391 585.749,596.798 v1(587.146,598.195) ; DD9.29@601.8,596.95 603.404,596.95 v1(603.58,597.126)
  Bottom Layer w0.15: v1(587.146,598.195) 588.184,597.158 603.549,597.158 v1(603.58,597.126)
G_IN: L5.1 VD6.3 X2.2 | length 45
  Top Layer w0.15: L5.1@575,646.5 578.657,646.5 579.349,647.192 579.349,662.216 575.5,666.064 VD6.3@575.5,672 v1(575.5,675.5)
  Bottom Layer w0.15: X2.2@565,675.5 v1(575.5,675.5)
G_INA0: DD9.125 R40.2 | length 54.9
  Top Layer w0.15: R40.2@612.5,657 611.538,657 610.874,656.336 610.874,651.837 611.728,650.983 612.832,650.983 v1(612.851,651.002) ; DD9.125@629.1,619.45 629.1,621.564 629.303,621.767 629.303,631.589 630.834,633.12 630.834,642.803 v1(629.152,644.486)
  Bottom Layer w0.15: v1(612.851,651.002) 623.888,651.002 629.152,645.738 v1(629.152,644.486)
G_INA1: DD9.126 R39.2 | length 55.9
  Top Layer w0.15: R39.2@607.5,657 606.552,657 606.4,656.848 606.4,651.764 606.679,651.485 607.644,651.485 v1(610.946,648.183) ; DD9.126@628.45,619.45 628.45,622.173 628.899,622.622 628.899,632.097 628.98,632.178 v1(628.98,642.487)
  Bottom Layer w0.15: v1(610.946,648.183) 621.451,648.183 627.146,642.487 v1(628.98,642.487)
G_INA2: DD9.127 R38.2 | length 79.2
  Top Layer w0.15: R38.2@602.5,660 602.64,660 v1(602.64,658.495) ; DD9.127@627.8,619.45 v1(627.8,621.106) ; v1(632.511,652.907) 632.511,648.208 633.019,647.7 634.035,647.7 635.914,645.82 v1(635.914,621.309)
  Bottom Layer w0.15: v1(602.64,658.495) 608.195,658.495 613.783,652.907 v1(632.511,652.907) ; v1(627.8,621.106) 628.523,621.106 630.784,618.846 633.451,618.846 v1(635.914,621.309)
G_INA3: DD9.128 R37.2 | length 83.5
  Top Layer w0.15: v1(594.411,635.709) 595.48,636.778 595.48,652.27 591.425,656.325 591.425,657.643 591.566,657.784 595.605,657.784 597.205,659.384 597.205,660 R37.2@597.5,660 ; DD9.128@627.15,619.45 627.15,622.578 628.345,623.773 v1(628.345,635.813)
  Bottom Layer w0.15: v1(594.411,635.709) 594.411,635.463 595.376,634.498 596.138,634.498 597.154,635.514 597.941,635.514 598.24,635.813 v1(628.345,635.813)
G_INA4: DD9.130 R36.2 | length 63.5
  Top Layer w0.15: R36.2@592.5,657 593.391,657 596.392,653.999 596.392,651.815 596.519,651.688 597.865,651.688 600.05,649.503 600.05,642.264 603.504,638.81 614.426,638.81 617.169,636.067 617.169,631.876 617.728,631.317 625.246,631.317 625.85,630.713 DD9.130@625.85,619.45
G_INA5: DD9.131 R35.2 | length 71.9
  Top Layer w0.15: v1(586.943,640.004) 586.41,640.537 586.41,651.136 586.003,651.542 586.003,656.314 586.689,657 R35.2@587.5,657 ; v1(624.053,624.815) 625.2,623.667 DD9.131@625.2,619.45
  Bottom Layer w0.15: v1(586.943,640.004) 586.943,632.892 588.223,631.612 595.183,631.612 596.875,629.92 610.057,629.92 615.163,624.815 v1(624.053,624.815)
G_INA6: DD9.133 R34.2 | length 80.6
  Top Layer w0.15: v1(579.321,630.862) 579.321,640.429 580.771,641.879 580.771,656.365 581.406,657 R34.2@582.5,657 ; v1(623.773,623.468) 623.9,623.342 DD9.133@623.9,619.45
  Bottom Layer w0.15: v1(579.321,630.862) 582.371,627.812 590.829,627.812 596.087,622.554 604.317,622.554 605.403,623.64 612.663,623.64 612.834,623.468 v1(623.773,623.468)
G_INA7: DD9.134 R33.2 | length 86.8
  Top Layer w0.15: v1(588.518,620.776) 588.615,620.873 588.615,646.996 588.865,647.246 588.865,649.969 587.65,651.184 586.954,651.184 586.425,651.713 586.425,654.12 588.587,656.282 588.587,660.713 588.194,661.106 588.194,662.508 590,664.314 R33.2@590,665 ; v1(623.25,617.611) DD9.134@623.25,619.45
  Bottom Layer w0.15: v1(588.518,620.776) 590.482,618.812 597.47,618.812 597.874,619.216 606.658,619.216 608.922,616.952 611.027,616.952 611.515,616.464 613.338,616.464 613.866,616.991 622.63,616.991 v1(623.25,617.611)
G_INB0: DD9.136 R81.2 R89.2 | length 163.1
  Top Layer w0.15: R81.2@567.5,617.5 567.5,617.576 569.036,619.112 v1(569.036,622.859) ; v1(621.792,621.792) 621.95,621.634 DD9.136@621.95,619.45 ; v1(633.298,639.75) 633.298,638.708 634.187,637.819 634.187,636.88 635.381,635.686 635.381,625.272 v1(635.279,625.17) ; v1(674.706,652.659) 674.706,669.163 677.5,671.957 R89.2@677.5,675
  Bottom Layer w0.15: v1(569.036,622.859) 592.011,622.859 593.296,621.574 609.515,621.574 610.616,622.675 611.632,622.675 612.515,621.792 v1(621.792,621.792) 631.901,621.792 v1(635.279,625.17) ; v1(633.298,639.75) 637.159,639.75 647.776,650.367 672.414,650.367 v1(674.706,652.659)
G_INB1: DD9.137 R80.2 R88.2 | length 169.6
  Top Layer w0.15: R80.2@567.5,622.5 567.5,621.538 567.652,621.386 v1(568.401,621.386) ; v1(621.3,617.906) DD9.137@621.3,619.45 ; R88.2@680.5,670 680.5,666.877 679.725,666.102 679.725,648.919 681.584,647.061 681.584,631.165 v1(682.32,630.428)
  Bottom Layer w0.15: v1(568.401,621.386) 568.841,621.826 590.161,621.826 592.771,619.216 596.59,619.216 596.994,619.62 619.586,619.62 v1(621.3,617.906) 621.3,618.744 627.908,618.744 629.813,616.839 638.327,616.839 641.928,620.44 647.313,620.44 648.612,621.739 648.612,624.584 653.218,629.189 653.218,629.564 653.65,629.996 681.888,629.996 v1(682.32,630.428)
G_INB2: DD9.139 R79.2 R87.2 | length 116.6
  Top Layer w0.15: R79.2@594.5,622.5 594.5,623.316 594.779,623.595 598.678,623.595 v1(599.079,623.194) ; DD9.139@620,619.45 v1(620,624.12) ; v1(626.618,624.18) 626.618,640.436 v1(628.04,641.858) ; v1(677.5,663.524) R87.2@677.5,665
  Bottom Layer w0.15: v1(599.079,623.194) 600.005,624.12 v1(620,624.12) 620.059,624.18 v1(626.618,624.18) ; v1(628.04,641.858) 629.361,641.858 629.869,642.366 634.426,642.366 635.874,643.814 636.056,643.814 636.386,644.144 636.386,644.326 654.314,662.254 676.23,662.254 v1(677.5,663.524)
G_INB3: DD9.140 R78.2 R86.2 | length 117
  Top Layer w0.15: R78.2@597.5,627.5 v1(597.5,630.555) ; DD9.140@619.35,619.45 v1(619.35,626.977) v1(619.35,628.777) ; v1(640.766,628.929) 642.62,630.784 v1(642.62,639.343) ; R86.2@677.5,660 677.5,658.21 678.282,657.428 v1(678.282,653.051)
  Bottom Layer w0.15: v1(597.5,630.555) 615.772,630.555 v1(619.35,626.977) ; v1(619.35,628.777) 619.36,628.767 640.603,628.767 v1(640.766,628.929) ; v1(642.62,639.343) 643.359,640.082 649.836,640.082 658.368,648.614 673.845,648.614 v1(678.282,653.051)
G_INB4: DD9.142 R77.2 R85.2 | length 123.5
  Top Layer w0.15: R77.2@597.5,632.5 597.5,633.781 596.722,634.559 596.722,638.556 597.332,639.166 602.31,639.166 603.707,637.769 614.539,637.769 616.737,635.57 616.737,633.73 ; v1(615.798,634.67) 616.737,633.73 ; DD9.142@618.05,619.45 618.05,626.184 ; v1(674.878,647.776) 674.878,651.281 677.5,653.903 R85.2@677.5,655 ; 616.737,628.159 618.05,626.847 618.05,626.184 ; 616.737,628.159 616.737,627.497 618.05,626.184 ; 616.737,628.159 616.737,633.73
  Bottom Layer w0.15: v1(615.798,634.67) 617.195,634.67 617.423,634.441 641.248,634.441 643.534,632.155 648.335,632.155 663.448,647.268 674.37,647.268 v1(674.878,647.776)
G_INB5: DD9.143 R76.2 R84.2 | length 120.3
  Top Layer w0.15: R76.2@597.5,637.5 597.5,637.432 598.072,637.432 598.447,637.057 ; v1(613.893,637.057) 598.447,637.057 ; DD9.143@617.4,619.45 617.4,625.845 615.848,627.397 615.848,633.857 615.654,634.051 601.453,634.051 598.447,637.057 ; v1(677.5,648.405) R84.2@677.5,650
  Bottom Layer w0.15: v1(613.893,637.057) 625.142,637.057 626.437,638.353 650.265,638.353 659.867,647.954 673.798,647.954 674.249,648.405 v1(677.5,648.405)
G_INB6: DD9.144 R75.2 R83.2 | length 98.6
  Top Layer w0.15: DD9.144@616.75,619.45 v1(616.75,622.478) ; R75.2@670,630 R75.2@670.306,630 ; v1(671.906,636.143) 671.906,630.838 671.068,630 R75.2@670.306,630 ; v1(675.132,642.849) 671.678,639.394 671.678,634.06 670.306,632.689 R75.2@670.306,630 ; v1(682.226,643.484) 683.743,645 R83.2@685.5,645
  Bottom Layer w0.15: v1(616.75,622.478) 629.573,622.478 634.958,627.863 646.072,627.863 646.139,627.93 647.488,627.93 649.086,629.528 649.086,631.25 654.029,636.194 671.855,636.194 v1(671.906,636.143) ; v1(675.132,642.849) 675.234,642.849 675.869,643.484 v1(682.226,643.484)
G_INB7: DD9.145 R74.2 R82.2 | length 133.3
  Top Layer w0.15: DD9.145@616.1,619.45 616.1,625.295 v1(616.315,625.51) ; R74.2@665,630 665.302,630 665.302,632.282 v1(667.258,634.238) ; v1(690.093,634.238) 690.093,645 R82.2@690.5,645 690.601,645 v1(690.601,637.608)
  Bottom Layer w0.15: v1(616.315,625.51) 619.109,625.51 621.9,628.3 645.635,628.3 645.668,628.334 647.257,628.334 648.612,629.689 648.612,631.432 654.787,637.608 v1(690.601,637.608) ; v1(667.258,634.238) v1(690.093,634.238)
GA0: C126.2 DD14.8 R152.1 | length 60.1
  Top Layer w0.15: C126.2@595,502.5 595,503.001 597.484,505.485 597.484,529.742 ; R152.1@597.5,535 597.484,535 597.484,529.742 ; DD14.8@605,542.5 605,537.461 604.36,536.821 595.089,536.821 594.157,535.889 594.157,529.59 594.589,529.158 596.9,529.158 597.484,529.742
GA1: C124.2 DD14.10 R151.1 | length 37.5
  Top Layer w0.15: C124.2@595,530 595,535.036 595.884,535.92 600.044,535.92 600.964,535 601.65,535 ; R151.1@602.5,535 601.65,535 ; DD14.10@610,542.5 608.584,541.084 608.584,533.552 604.012,528.98 601.98,528.98 601.65,529.311 601.65,535
GA2: C122.2 DD14.4 R150.1 | length 23.2
  Top Layer w0.15: DD14.4@595,542.5 595,541.04 v1(595.351,540.69) ; C122.2@602.5,530 602.5,530.821 606.679,535 R150.1@607.5,535
  Bottom Layer w0.15: v1(595.351,540.69) 602.5,533.54 C122.2@602.5,530
GA3: C120.2 DD14.6 R149.1 | length 22.7
  Top Layer w0.15: C120.2@610,530 612.5,532.5 R149.1@612.5,535
  Bottom Layer w0.15: DD14.6@600,542.5 600,540 C120.2@610,530
GA4: C118.2 DD14.7 R148.1 | length 26.7
  Top Layer w0.15: v1(616.052,538.353) 616.255,538.15 616.255,535.432 616.687,535 R148.1@617.5,535 C118.2@617.5,530
  Bottom Layer w0.15: DD14.7@602.5,542.5 603.329,543.329 610.568,543.329 610.845,543.052 610.845,540.842 613.334,538.353 v1(616.052,538.353)
GA5: C115.2 DD14.11 R147.1 | length 41.7
  Top Layer w0.15: DD14.11@612.5,542.5 613.331,543.331 615.569,543.331 615.848,543.052 615.848,541.934 614.477,540.563 614.477,528.355 616.661,526.171 618.338,526.171 619.684,527.517 619.684,534.416 620.268,535 R147.1@622.5,535 622.5,532.5 C115.2@625,530
GA6: C112.2 DD14.12 R146.1 | length 47.3
  Top Layer w0.15: DD14.12@615,542.5 614.426,542.5 614.07,542.144 614.07,526.288 614.591,525.767 626.961,525.767 627.482,526.288 627.482,535 R146.1@627.5,535 628.676,535 632.5,531.176 C112.2@632.5,530
GA7: C109.2 DD14.14 R145.1 | length 60.3
  Top Layer w0.15: C109.2@590,562.5 591.109,561.391 591.109,555.193 v1(590.804,554.888) ; DD14.14@620,542.5 622.242,540.258 629.412,540.258 629.996,539.674 629.996,535.94 630.936,535 R145.1@632.5,535
  Bottom Layer w0.15: v1(590.804,554.888) 596.163,554.888 602.875,548.177 614.323,548.177 DD14.14@620,542.5
GB0: C106.2 DD13.8 R144.1 | length 113.6
  Top Layer w0.15: C106.2@597.5,562.5 599.874,564.874 599.874,565.293 603.91,569.329 603.91,571.89 604.52,572.5 R144.1@607.5,572.5 ; v1(677.367,553.568) 677.5,553.435 DD13.8@677.5,542.3
  Bottom Layer w0.15: C106.2@597.5,562.5 603.817,562.5 606.298,560.019 606.298,555.142 606.929,554.511 652.138,554.511 652.658,553.991 664.771,553.991 665.195,553.568 v1(677.367,553.568)
GB1: C103.2 DD13.10 R143.1 | length 107.3
  Top Layer w0.15: C103.2@605,562.5 605,563.005 612.855,570.861 ; R143.1@612.5,572.5 612.496,572.5 612.496,571.221 612.855,570.861 ; v1(613.207,570.509) 612.855,570.861 ; v1(676.554,568.985) 676.554,556.235 682.5,550.289 DD13.10@682.5,542.3
  Bottom Layer w0.15: v1(613.207,570.509) 659.523,570.509 659.822,570.808 660.784,570.808 661.389,570.203 662.129,570.203 663.296,569.036 676.504,569.036 v1(676.554,568.985)
GB2: C100.2 DD13.4 R142.1 | length 103.9
  Top Layer w0.15: C100.2@612.5,562.5 617.525,567.525 R142.1@617.525,572.5 ; R142.1@617.5,572.5 R142.1@617.525,572.5 ; v1(618.338,545.236) 618.338,571.687 R142.1@617.525,572.5
  Bottom Layer w0.15: v1(618.338,545.236) 618.779,544.795 672.627,544.795 673.354,544.068 673.354,541.725 673.1,541.471 668.934,541.471 668.105,542.3 DD13.4@667.5,542.3
GB3: C96.2 DD13.6 R141.1 | length 82.1
  Top Layer w0.15: v1(621.665,543.992) 620.863,544.794 620.863,564.637 C96.2@620,565.5 622.5,568 R141.1@622.5,572.5
  Bottom Layer w0.15: v1(621.665,543.992) 622.065,544.391 670.409,544.391 DD13.6@672.5,542.3
GB4: C92.2 DD13.7 R140.1 | length 81.9
  Top Layer w0.15: C92.2@627.5,565.5 R140.1@627.5,572.5 ; v1(674.903,567.207) 675.945,566.166 675.945,543.245 DD13.7@675,542.3
  Bottom Layer w0.15: C92.2@627.5,565.5 630.477,568.477 632.181,568.477 633.451,567.207 v1(674.903,567.207)
GB5: C87.2 DD13.11 R139.1 | length 80
  Top Layer w0.15: R139.1@632.5,572.5 635.94,569.06 ; C87.2@635,562.5 635,563.524 635.94,564.464 635.94,569.06 ; v1(640.842,551.161) 640.842,564.158 635.94,569.06
  Bottom Layer w0.15: v1(640.842,551.161) 646.69,545.313 682.752,545.313 685.013,543.052 685.013,542.3 DD13.11@685,542.3
GB6: C83.2 DD13.12 R138.1 | length 71.1
  Top Layer w0.15: R138.1@637.5,572.5 637.489,572.5 637.489,571.246 642.5,566.235 C83.2@642.5,565.5 641.655,564.655 641.655,554.914 v1(643.611,552.958)
  Bottom Layer w0.15: v1(643.611,552.958) 645.852,550.717 679.083,550.717 DD13.12@687.5,542.3
GB7: C79.2 DD13.14 R137.1 | length 75.9
  Top Layer w0.15: R137.1@642.5,572.5 642.493,572.5 642.493,573.075 643.128,573.71 648.208,573.71 648.843,573.075 648.843,565.881 649.224,565.5 C79.2@650,565.5 650.854,564.646 650.854,552.937 v1(650.367,552.45)
  Bottom Layer w0.15: v1(650.367,552.45) 651.044,551.773 683.027,551.773 DD13.14@692.5,542.3